# Altium PCB Microneedle_Patch_Panel.PcbDoc
Units mm, origin at the board's own origin, x right, y up, seen from the top; angles counter-clockwise.
Board outline 181.5 x 116 mm, 2 copper layers (Top, Bottom), stack 0.137 mm thick; 34 components, 0 nets, 0 pads, 0 vias.
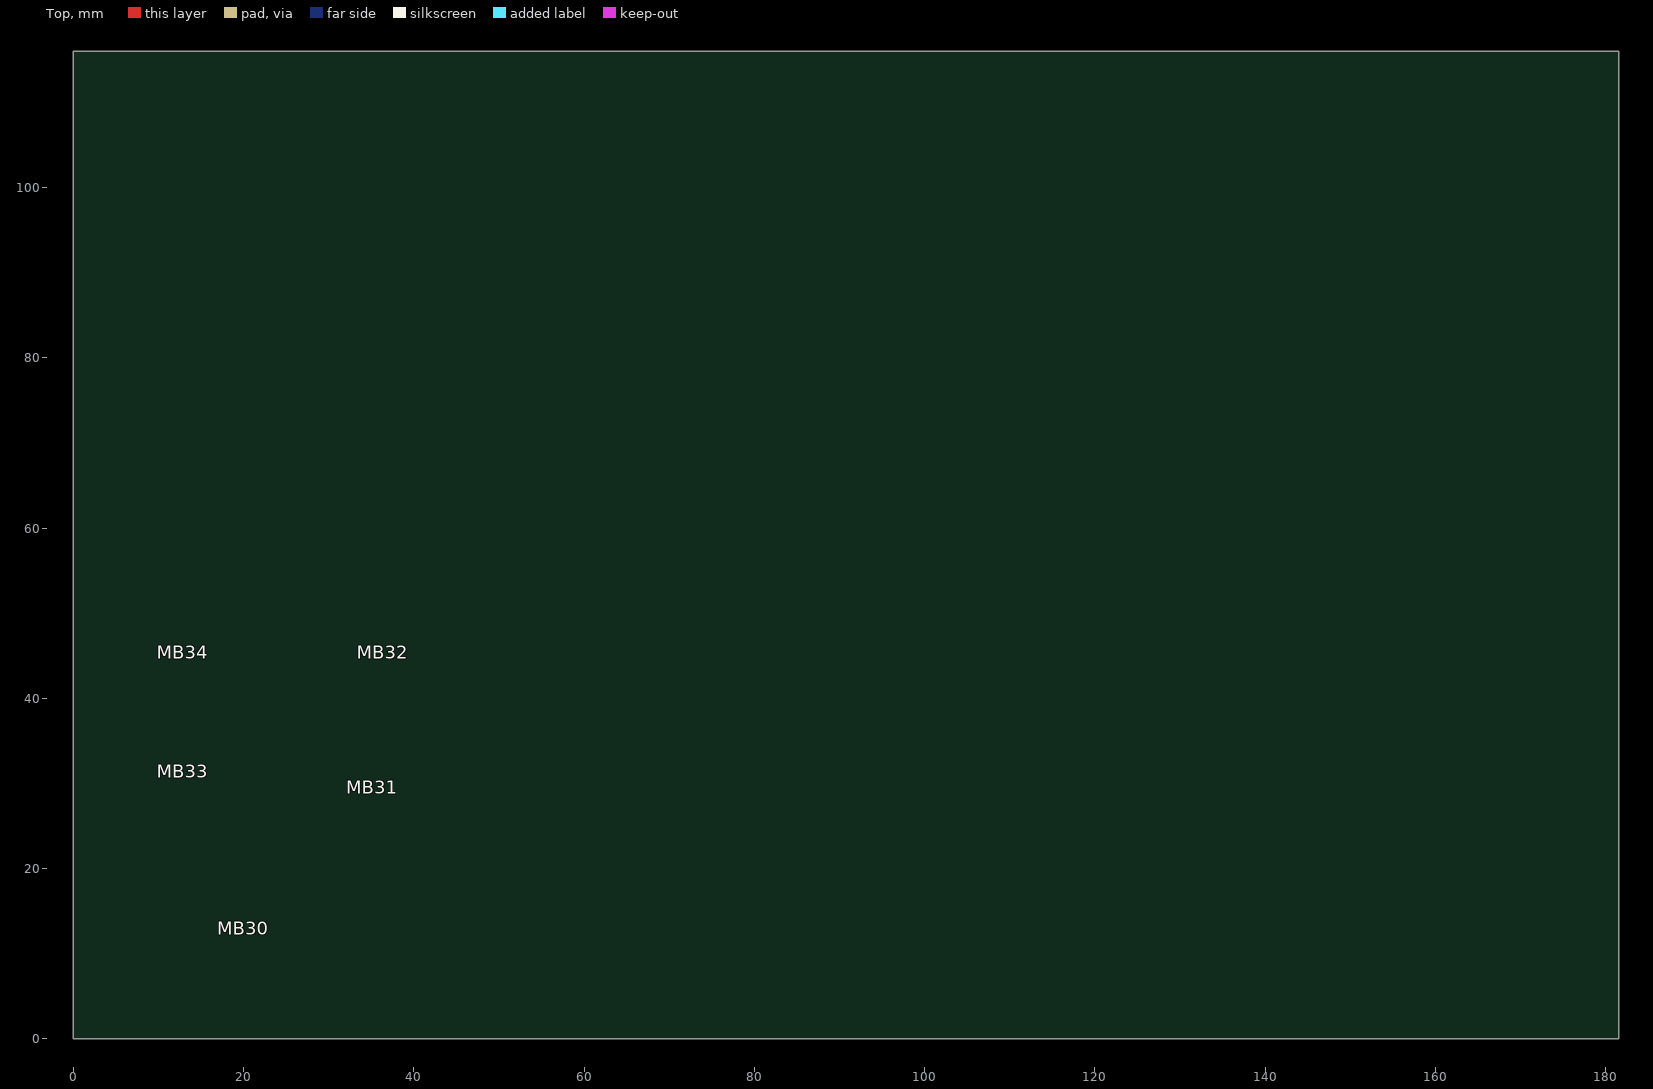
[diagram p0: Top view]
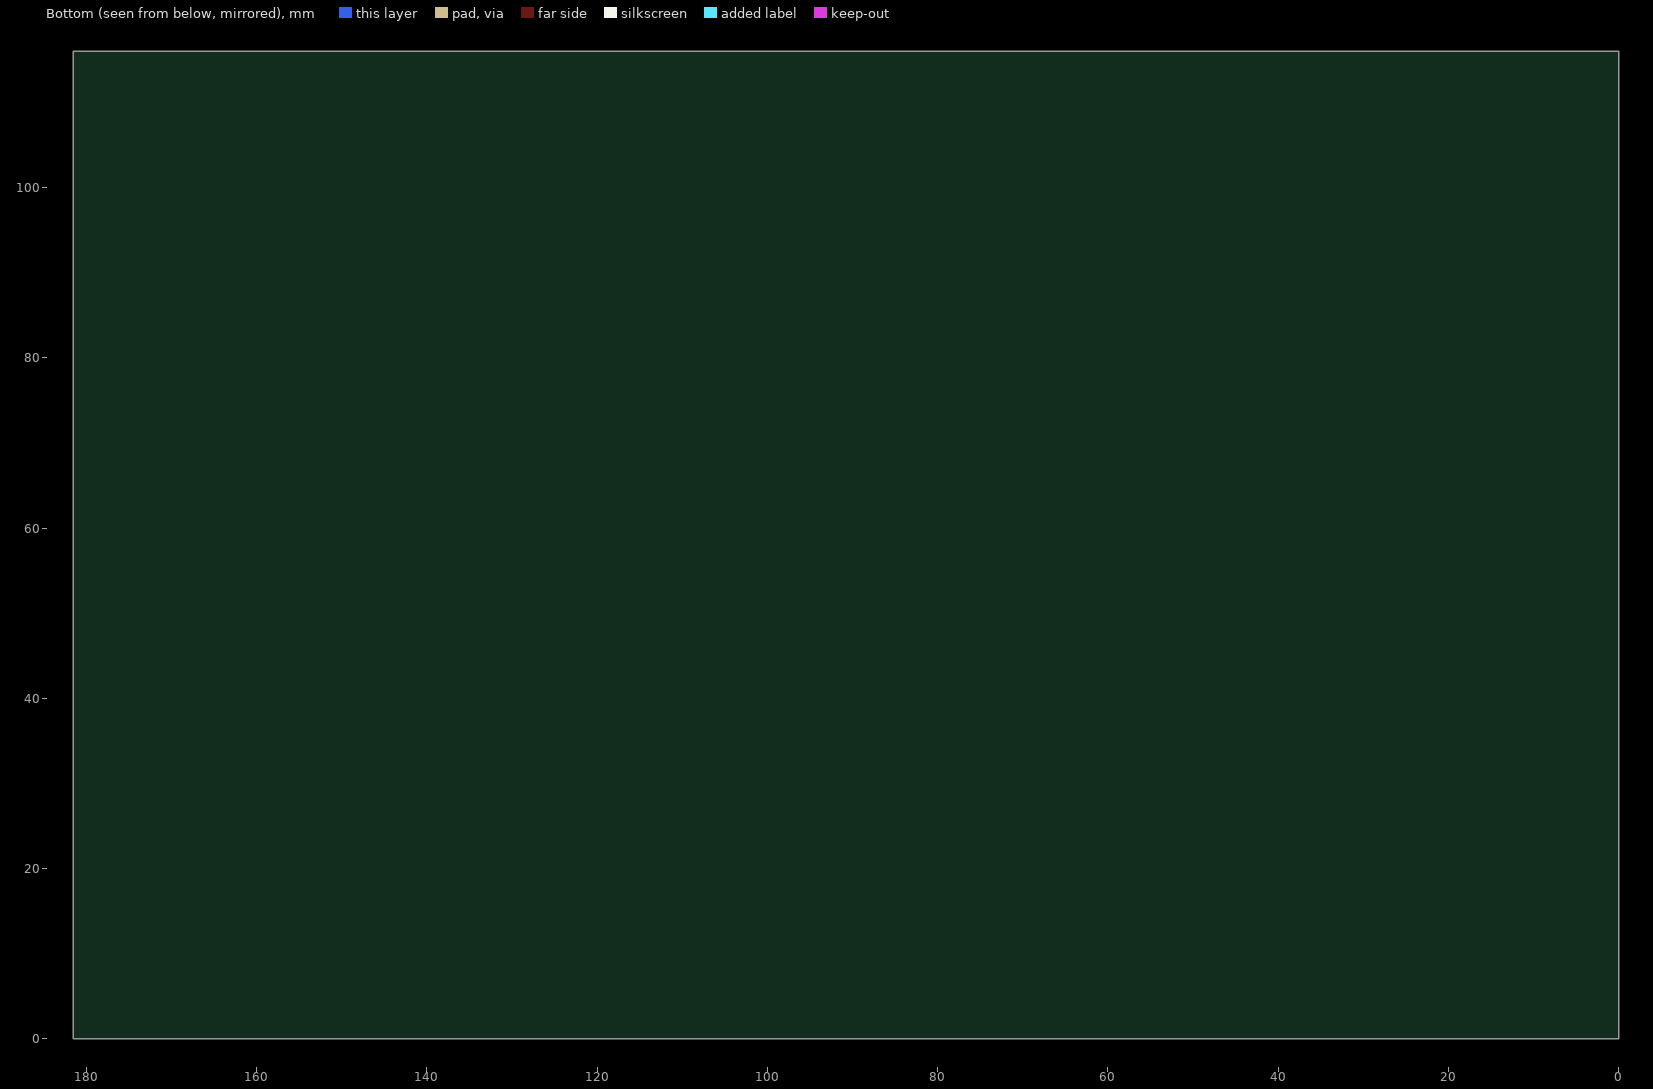
[diagram p1: Bottom view, seen from below]

## Layer stack, top to bottom
Board Layer Stack Top Coverlay: solder mask 0.025, Polymide, Dk 3.4
Adhesive 3: prepreg 0.025, Adhesive, Dk 3.3
Top: signal copper 0.018
Dielectric 1: core 0.013, Composite dielectric, Dk 3.3
Dielectric 3: core 0.025, Polymide, Dk 3.4
Dielectric 2: core 0.013, Composite dielectric, Dk 3.3
Bottom: signal copper 0.018
Adhesive 2: prepreg 0.025, Adhesive, Dk 3.3
Board Layer Stack Bottom Coverlay: solder mask 0.025, Polymide, Dk 3.4

## Board outline
0,0 0,116 181.5,116 181.5,0

## Design rules (kind name [scope] priority, off if disabled: settings)
BoardOutlineClearance ZIF_BoardEdge [InPadClass('ZIF_Pads')] p1: gap=0.305 ignorepadtopadclearanceinfootprint=FALSE except(0: SMDPad-OutlineEdge)
BoardOutlineClearance [All] p2: gap=0.305 ignorepadtopadclearanceinfootprint=FALSE
Clearance [All] p1: gap=0.203 ignorepadtopadclearanceinfootprint=TRUE except(0.127: Arc-SMDPad Track-SMDPad SMDPad-SMDPad)
ComponentClearance [All] p1: gap=0.102 collisioncheckmode=3 verticalgap=0.102 showdistances=FALSE
HoleSize [All] p1: absolutevalues=TRUE maxlimit=25.4 minlimit=0.102 maxpercent=80.000 minpercent=20.000
HoleToHoleClearance [All] p1: gap=0.254 allowstackedmicrovias=FALSE
MinimumSolderMaskSliver [All] p1: minsoldermaskwidth=0.102
PlaneClearance [All] p1: clearance=0.152
PlaneConnect [All] p1: pad.planeconnectstyle=Relief pad.reliefexpansion=0.508 pad.reliefentries=4 pad.reliefconductorwidth=0.254 pad.reliefairgap=0.254 via.planeconnectstyle=Direct via.reliefexpansion=0.508 via.reliefentries=4 via.reliefconductorwidth=0.254 via.reliefairgap=0.254
PolygonConnect [All] p1: thpad.connectstyle=Relief thpad.reliefconductorwidth=0.254 thpad.reliefentries=4 thpad.polygonreliefangle="90 Angle" thpad.airgapwidth=0.254 smdpad.connectstyle=Direct smdpad.reliefconductorwidth=0.254 smdpad.reliefentries=4 smdpad.polygonreliefangle="90 Angle" smdpad.airgapwidth=0.254 via.connectstyle=Direct via.reliefconductorwidth=0.254 via.reliefentries=4 via.polygonreliefangle="90 Angle" via.airgapwidth=0.254
RoutingVias [All] p1: holewidth=0.152 width=0.457 viastyle="Through Hole" minholewidth=0.152 minwidth=0.457 maxholewidth=0.152 maxwidth=0.457
SilkToSilkClearance [All] p1: silktosilkclearance=0.102
SilkToSolderMaskClearance [IsPad] p1: minsilkscreentomaskgap=0.051 clearancetoexposedcopper=FALSE
SolderMaskExpansion [All] p1: expansion=0.051 istentingtop=FALSE
Width [All] p1: maxlimit=0.102 minlimit=0.102 preferedwidth=0.102 minimp=50.000000 maximp=50.000000 favimp=50.000000
22 further rules are at their usual default settings.

## Components (designator, comment, footprint, x,y, rotation, side; value= is the part's Value field where it differs from the comment)
MB1 "Part Number" Mousebite 173.583,-12.712 r90 top
MB2 "Part Number" Mousebite 179.583,-12.712 r90 top
MB3 "Part Number" Mousebite 185.583,-12.712 r90 top
MB4 "Part Number" Mousebite 162.583,-12.712 r90 top
MB5 "Part Number" Mousebite 168.583,-12.712 r90 top
MB6 "Part Number" Mousebite 156.583,-12.712 r90 top
MB7 "Part Number" Mousebite 138.583,-12.712 r90 top
MB8 "Part Number" Mousebite 144.583,-12.712 r90 top
MB9 "Part Number" Mousebite 150.583,-12.712 r90 top
MB10 "Part Number" Mousebite 125.583,-12.712 r90 top
MB11 "Part Number" Mousebite 132.583,-12.712 r90 top
MB12 "Part Number" Mousebite 110.583,-12.712 r90 top
MB13 "Part Number" Mousebite 117.583,-12.712 r90 top
MB14 "Part Number" Mousebite 68.583,-12.712 r90 top
MB15 "Part Number" Mousebite 75.583,-12.712 r90 top
MB16 "Part Number" Mousebite 82.583,-12.712 r90 top
MB17 "Part Number" Mousebite 89.583,-12.712 r90 top
MB18 "Part Number" Mousebite 96.583,-12.712 r90 top
MB19 "Part Number" Mousebite 103.583,-12.712 r90 top
MB20 "Part Number" Mousebite 53.583,-12.712 r90 top
MB21 "Part Number" Mousebite 61.583,-12.712 r90 top
MB22 "Part Number" Mousebite 39.583,-12.712 r90 top
MB23 "Part Number" Mousebite 46.583,-12.712 r90 top
MB24 "Part Number" Mousebite 24.583,-12.712 r90 top
MB25 "Part Number" Mousebite 31.583,-12.712 r90 top
MB26 "Part Number" Mousebite 9.583,-12.712 r90 top
MB27 "Part Number" Mousebite 17.583,-12.712 r90 top
MB28 "Part Number" Mousebite 2.583,-12.712 r90 top
MB29 "Part Number" Mousebite -24.2,49.675 r0 top
MB30 "Part Number" Mousebite 21,10.25 r0 top
MB31 "Part Number" Mousebite 33.025,23.625 r90 top
MB32 "Part Number" Mousebite 34.275,39.525 r90 top
MB33 "Part Number" Mousebite 10.25,25.5 r270 top
MB34 "Part Number" Mousebite 10.25,39.5 r270 top

## Footprints (in the part's own frame and the unit in brackets; to place one, negate y for a bottom-side part, rotate by r counter-clockwise, add the part's x,y. Pads: shape width x height; smd on the part's side, far side on the other; paste and mask are expansions set on the pad)
Mousebite [mm] "0.5 mm hole, 0.3 mm spacing, 5x, 1.5 mm diameter"

## Part data
MB1 MB2 MB3 MB4 MB5 MB6 MB7 MB8 MB9 MB10 MB11 MB12 MB13 MB14 MB15 MB16 MB17 MB18 MB19 MB20 MB21 MB22 MB23 MB24 MB25 MB26 MB27 MB28 MB29 MB30 MB31 MB32 MB33 MB34: library part Mousebite, "Mousebite, 0.5 mm hole 5x, 0.3 mm spacing, 1.5 mm tool route", GRAMS Lib Spec=2.7

## Nets (pads, with @x,y where several pads share a name; then routed paths per layer and width w, separated by ;. In a path a pad name is that pad's centre, name@x,y a point inside that pad or via, vN(x,y) a via of type N, cw(c..) or ccw(c..) an arc to the next point about the centre after c; other vN are vias at no path point)

## Polygon pours and split planes (outlines as drawn)
no net on Layer0 "Default Coverlay 1 Top" (split plane): 176 vertices, not listed, extent 0,0 30.8,93
no net on Layer0 "Default Coverlay 1 Bottom" (split plane): 176 vertices, not listed, extent 0,0 30.8,93

## Silkscreen, mask and mechanical layers (free items; w line width, h text height)
Manufacturing Notes:
  lines w0.1: 4.2,113 4.7,113 ; 4.7,112.5 4.7,113 ; 4.7,113.5 4.7,113 ; 5.2,113 4.7,113 ; 9.5,113 10,113 ; 10,112.5 10,113 ; 10,113.5 10,113 ; 10.5,113 10,113
Board Shape:
  the board outline again, w0.254

## Panel: embedded boards
"..\..\..\..\Microneedle_Patch\01 - SCHEMAS ET PCB\03 - REVISION 1_020\Microneedle_Patch.PcbDoc" at 54,11.5, 1 rows x 1 columns, spacing 63.5 x 38.1, rotation 0
"..\..\..\..\Microneedle_Patch_Mirrored\01 - SCHEMAS ET PCB\03 - REVISION 1_020\Microneedle_Patch_Mirrored.PcbDoc" at 96.5,11.5, 1 rows x 1 columns, spacing 63.5 x 38.1, rotation 0
"..\..\..\..\Microneedle_Patch_Mirrored\01 - SCHEMAS ET PCB\03 - REVISION 1_020\Microneedle_Patch_Mirrored.PcbDoc" at 139,11.5, 1 rows x 1 columns, spacing 63.5 x 38.1, rotation 0
"..\..\..\..\Microneedle_Patch\01 - SCHEMAS ET PCB\03 - REVISION 1_020\Microneedle_Patch.PcbDoc" at 11.5,11.5, 1 rows x 1 columns, spacing 63.5 x 38.1, rotation 0